# EAGLE board switch_AT10 (EAGLE 9.3.1)
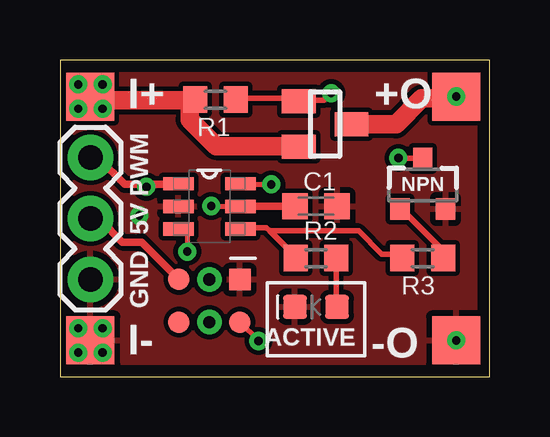
[diagram p0: board, top side]
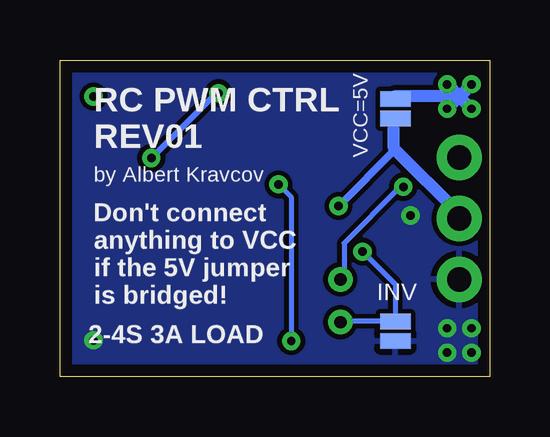
[diagram p1: board, bottom side, seen from below]

Size 17.91 x 13.21 mm. Coordinates in mm from the lower left corner, seen from the top.
Outline: 0,0 17.91,0 17.91,13.21 0,13.21 0,0
Copper layers (1*16): Top 0.035mm / dielectric 1.5mm / Bottom 0.035mm
Design rules "default *": minimum track width 6mil, minimum drill 0.35mm, track to track 6mil, track to pad 6mil, pad to pad 6mil, via to via 6mil, smd to smd 6mil, copper to edge 0.5mm, drill to drill 6mil, minimum pad ring 10mil, minimum via ring 8mil, stop-mask expansion 4mil, vias tented up to drill 2mm, thermal gap 10mil
Net classes: 0 default: width 0.2 mm, clearance 0.2 mm; 1 vcc: width 0.5 mm, clearance 0.381 mm

## Footprints (pad centres in the part's own frame; a part is rotated, then mirrored left to right if it is on the bottom)
TP20SQ = smd 2 x 2: TP 0,0
C0603K = smd 1.05 x 1.08: 1 -0.875,0; 2 0.875,0
LED-0603 = smd 1 x 1: A -0.877,0; C 0.877,0
SMT-JUMPER_2_NO_NO-SILK = smd 0.635 x 1.27: 1 -0.406,0; 2 0.406,0
SUPER-SOT3 = smd 1 x 1.4: 1 -0.95,-1.1; 2 0.95,-1.1; 3 0,1.1
1X03 = drill 1.016 pad 1.88: 1 0,0; 2 2.54,0; 3 5.08,0
SOT23-3 = smd 0.8 x 0.9: 1 -0.95,-1; 2 0.95,-1; 3 0,1.1
R0603 = smd 1 x 1.1: 1 -0.85,0; 2 0.85,0
SOT95P280X145-6N = smd 1.27 x 0.559: 1 -1.295,0.94; 2 -1.295,0; 3 -1.295,-0.94; 4 1.295,-0.94; 5 1.295,0; 6 1.295,0.94
ISCP_PADS_2ROW2HNEW = smd 0.889 x 0.889: 5V -1.27,1.778; GND 1.27,1.778; MISO -1.27,0; MOSI 0,1.778; RST 1.27,0; SCK 0,0 | drill 0.508 pad 0.889: MO 0,1.778; SC 0,0

## Placement (x,y rotation side)
+O  TPSQTP20SQ  [TP20SQ]  16.51,11.68 0 top
-O  TPSQTP20SQ  [TP20SQ]  16.51,1.52 0 top
C1  10uF  [C0603K]  10.67,7.11 0 top
D2  [LED-0603]  10.67,2.92 180 top
I+  TPSQTP20SQ  [TP20SQ]  1.27,11.68 0 top
I-  TPSQTP20SQ  [TP20SQ]  1.27,1.52 0 top
INV  PWM INV JUMPER  [SMT-JUMPER_2_NO_NO-SILK]  3.94,1.91 90 bottom
INV1  PWM INV JUMPER  [SMT-JUMPER_2_NO_NO-SILK]  3.94,11.18 270 bottom
IRLML6402  FDN360P  [SUPER-SOT3]  11.05,10.54 270 top
J1  [1X03]  1.27,4.06 90 top
NPN  BC848  [SOT23-3]  15.11,8 0 top
R1  10k  [R0603]  6.48,11.56 180 top
R2  100  [R0603]  10.67,4.95 180 top
R3  10k  [R0603]  15.11,4.95 180 top
U2  ATTINY10-TS8R  [SOT95P280X145-6N]  6.22,7.11 0 top
U$2  ISCP_PORTPOGONEW  [ISCP_PADS_2ROW2HNEW]  6.22,2.29 0 top

## Library data of the parts
+O -O I+ I- = testpad
C1 = rcl; SPICEPREFIX: C
D2 = SparkFun-LED
INV INV1 = SparkFun-Jumpers
IRLML6402 = transistor-power
J1 = SparkFun-Connectors
NPN = SparkFun-DiscreteSemi; PROD_ID: TRANS-08049
R1-R3 = rcl; SPICEPREFIX: R
U2 = ATTINY10-TS8R; AVAILABILITY: Unavailable; DESCRIPTION: Embedded microcontroller ATTINY10-TS8R SOT 23 Microchip Technology 8-Bit 10 MHz I/O number 4; MF: Microchip; MP: ATTINY10-TS8R; PACKAGE: SOT-23-6 Microchip; PRICE: None
U$2 = CoreDuino

## Nets
5V: C1.1 INV1.2 J1.2 U2.5 U$2.5V
GATE: R2.2 R3.2 U2.4
GND: -O.TP C1.2 D2.C I-.TP INV.1 J1.1 NPN.2 U2.2 U$2.GND
MI: U$2.MISO
MO: J1.3 U2.1 U$2.MO U$2.MOSI
N$1: NPN.1 R3.1
N$4: D2.A R2.1
NN: IRLML6402.1 NPN.3 R1.1
RES: U2.6 U$2.RST
SCK: INV.2 U2.3 U$2.SC U$2.SCK
VCC [vcc]: I+.TP INV1.1 IRLML6402.2 R1.2
VOUT [vcc]: +O.TP IRLML6402.3

## Tracks (layer width: path | path; a pad name or v marks a point on that pad's centre or on a via)
5V  (via drill 0.35)
  Top 0.2: 9.7,7.12 C1.1 | 7.6,7.12 U2.5 7.5,7.12 v6.3,7.12 | 1.7,6.52 1.3,6.52 J1.2 | 4.9,4.12 U$2.5V
  Top 0.305: 7.6,7.12 9.7,7.12 | 4.9,4.12 3.4,5.62 2.6,5.62 1.7,6.52
  Bottom 0.2: 3.95,9.47 4,9.52 | 4,10.72 INV1.2
  Bottom 0.305: 3.95,9.47 v6.3,7.12
  Bottom 0.508: 4,9.52 4,10.72 | 3.95,9.47 1.3,6.82 1.3,6.62 J1.2
GATE
  Top 0.2: 13.9,5.12 14.1,4.92 R3.2 | 7.6,6.22 U2.4
  Top 0.229: 7.6,6.22 8.6,6.22 8.74,6.09 | 8.74,6.09 9.63,5.2 9.63,5.14 R2.2 | 8.74,6.09 12.44,6.09 13.4,5.12 13.9,5.12
GND  (via drill 0.35)
  Top 0.5: I-.TP v0.76,1.02
  other vias: 3.3,6.73 0.76,2.03 1.78,1.02 1.78,2.03 16.51,1.52
  pour Top: -1.27,15.49 27.94,15.49 27.94,-2.29 -1.27,-2.29
  pour Bottom: -1.27,14.22 27.94,14.22 27.94,-2.29 -1.27,-2.29
MO  (via drill 0.35)
  Top 0.2: 1.6,9.12 1.3,9.12 J1.3 | 4.9,8.02 U2.1 | 3.6,8.02 v3.6,7.92
  Top 0.305: 4.9,8.02 3.6,8.02 2.7,8.02 1.6,9.12
  Bottom 0.2: v3.6,7.92 3.73,7.92 6.07,5.58 6.07,4.45 U$2.MO
N$1
  Top 0.2: 14.5,6.72 14.4,6.72 14.2,6.92 NPN.1 | 15.9,5.32 15.9,5.02 R3.1
  Top 0.229: 15.9,5.32 14.5,6.72
N$4
  Top 0.229: D2.A 11.52,2.95 R2.1
NN  (via drill 0.35)
  Top 0.2: 15.1,9.12 NPN.3 | 10,11.52 IRLML6402.1 10,11.62 | 7.35,11.62 R1.1
  Top 0.229: v14.1,9.12 15.1,9.12 | v11.3,11.82 11.15,11.67 11.13,11.67 10.98,11.52 10,11.52 | 10,11.62 7.35,11.62
  Bottom 0.2: v11.3,11.82 11.4,11.82
  Bottom 0.229: 11.4,11.82 v14.1,9.12
RES  (via drill 0.35)
  Top 0.2: v8.27,1.5 U$2.RST | v8.8,8.02 8.7,8.12 8.6,8.02 7.6,8.02 U2.6
  Bottom 0.2: v8.27,1.5 8.27,7.5 v8.8,8.02
SCK  (via drill 0.35)
  Top 0.2: v5.3,5.22 5.3,5.92 5,6.22 U2.3 | 6.2,2.32 U$2.SCK
  Bottom 0.2: v5.3,5.22 3.94,3.86 INV.2 6.2,2.32 U$2.SCK
VCC  (via drill 0.35)
  Top 0.5: 1.3,11.62 1.4,11.52 | 5.55,11.52 R1.2 5.5,11.42 5.5,11.32 5.4,11.22 | 9.9,9.62 IRLML6402.2 | I+.TP v1.78,11.18 | I+.TP v1.78,12.19 | I+.TP v0.76,12.19 | I+.TP 1.3,11.65 1.3,11.62 | v0.76,11.18 1.21,11.62 1.3,11.62 | 3.72,11.52 3.81,11.52
  Top 0.762: 1.4,11.52 3.72,11.52 | 3.81,11.52 5.55,11.52 | 9.9,9.62 6.5,9.62 5.4,10.72 5.4,11.22
  Bottom 0.5: v0.76,12.19 1.24,11.72 I+.TP | I+.TP v1.78,11.18 | v1.78,12.19 I+.TP | I+.TP v0.76,11.18 | INV1.1 3.94,11.72
  Bottom 0.508: 3.94,11.72 1.24,11.72
VOUT  (via drill 0.35)
  Top 0.5: 16.48,11.6 16.5,11.62 +O.TP | 12.2,10.52 IRLML6402.3
  Top 0.762: 12.2,10.52 14,10.52 15.08,11.6 16.48,11.6
  other vias: 16.51,11.68

## Text on the board
tNames: PWM | 5V | GND | ACTIVE
bNames: VCC=5V | RC PWM CTRL / REV01 | by Albert Kravcov | Don't connect / anything to VCC / if the 5V jumper / is bridged! | 2-4S 3A LOAD
_tNames: D3 | I+ | R5 | R4 | NPN | +O | R2 | • | S1 | C1 | R1 | I- | -O
_bNames: OUT | G2 | INV | G1 | IN